# Altium PCB trial.PcbDoc
Units mm, origin at the board's own origin, x right, y up, seen from the top; angles counter-clockwise.
Board outline 60.58 x 35.94 mm, 4 copper layers (Top Layer, Layer 1, Layer 2, Bottom Layer), stack 0.603 mm thick; 3 components, 0 nets, 15 pads, 0 vias.
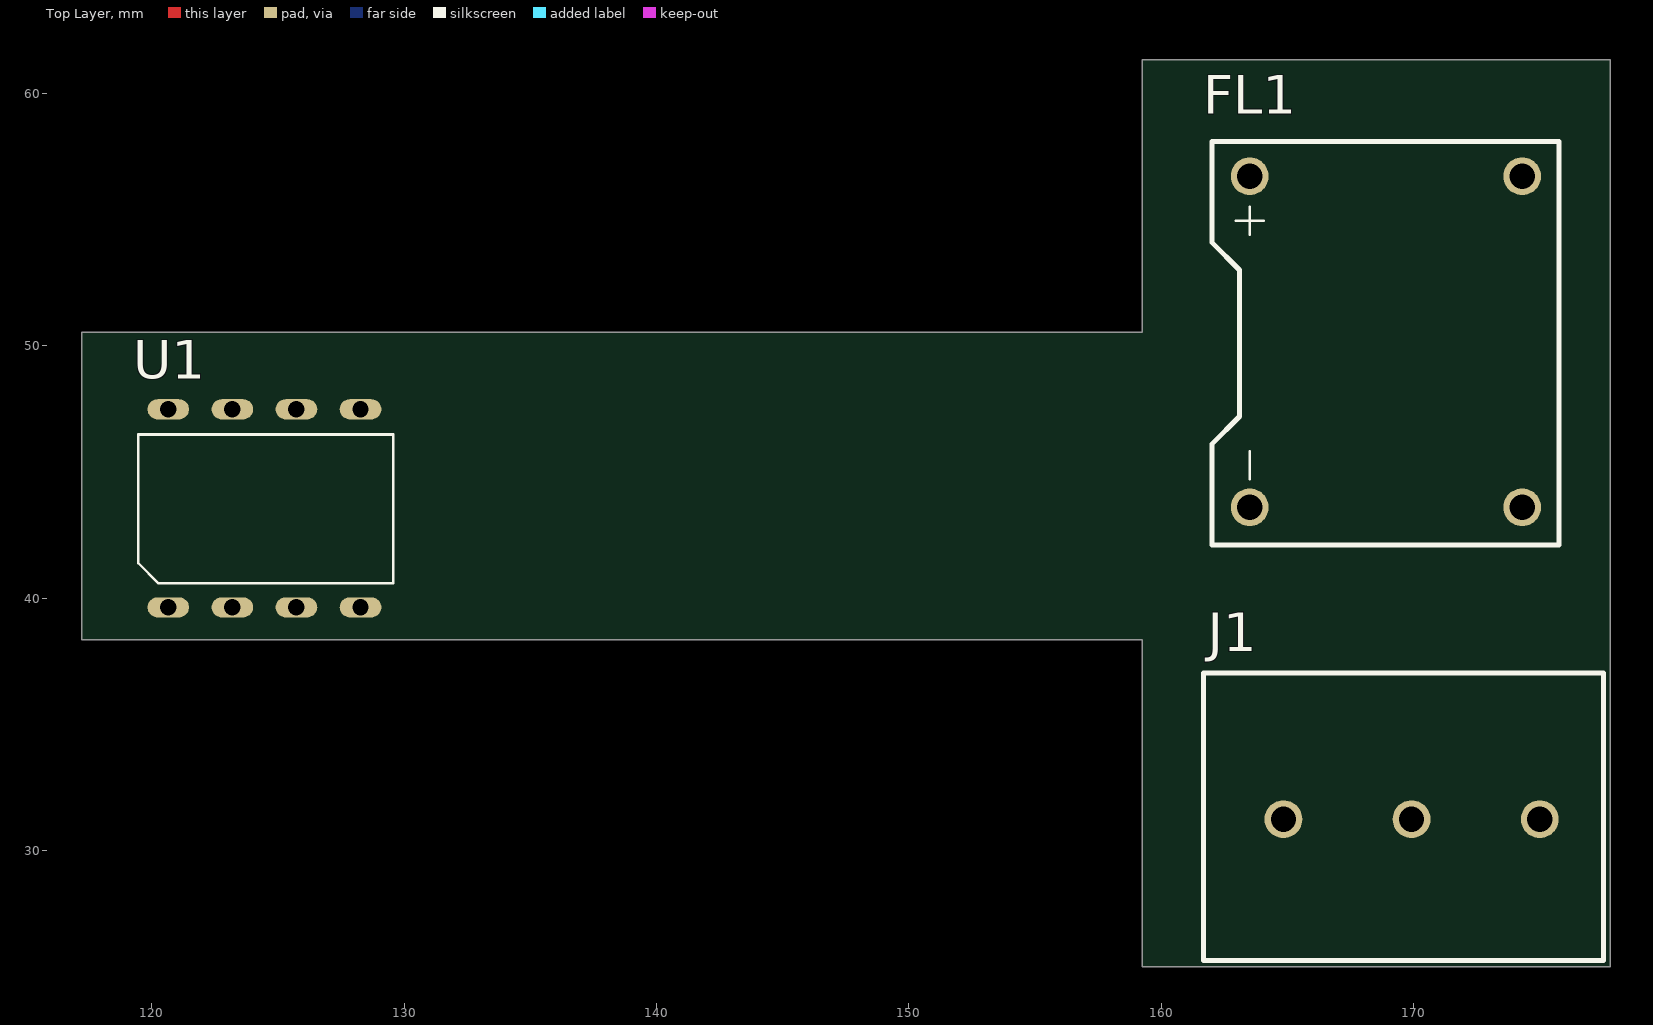
[diagram p0: Top Layer view]
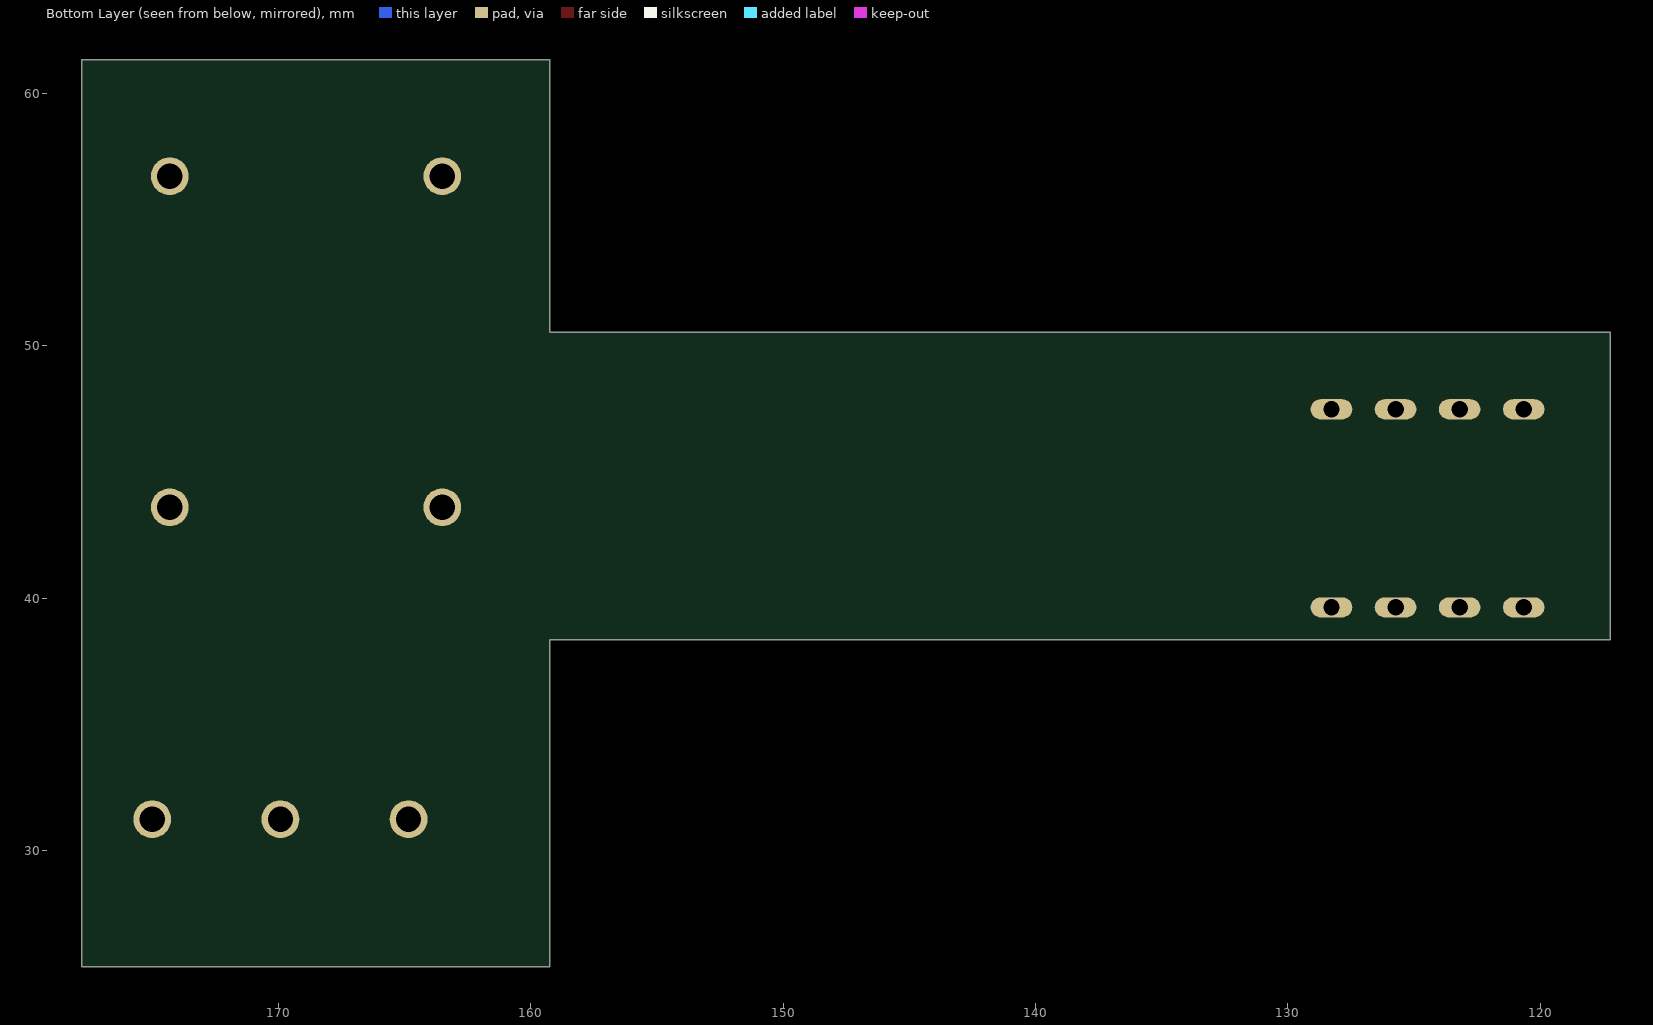
[diagram p1: Bottom Layer view, seen from below]
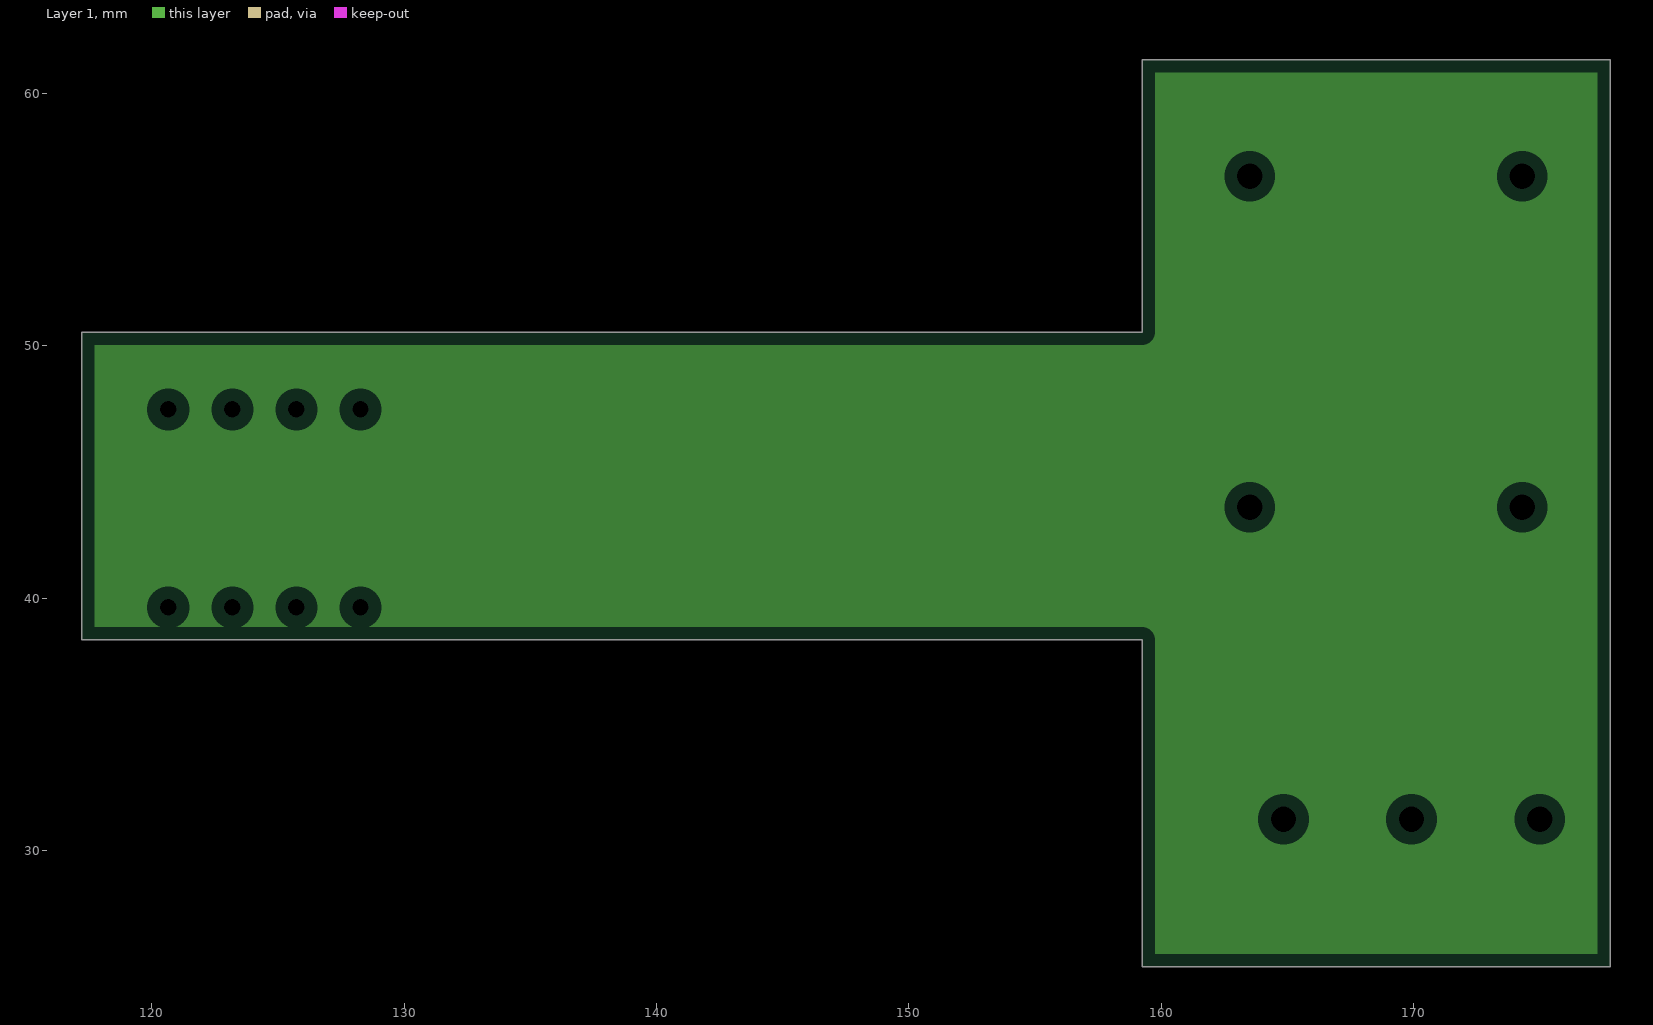
[diagram p2: Layer 1, clearances drawn from the general rule]
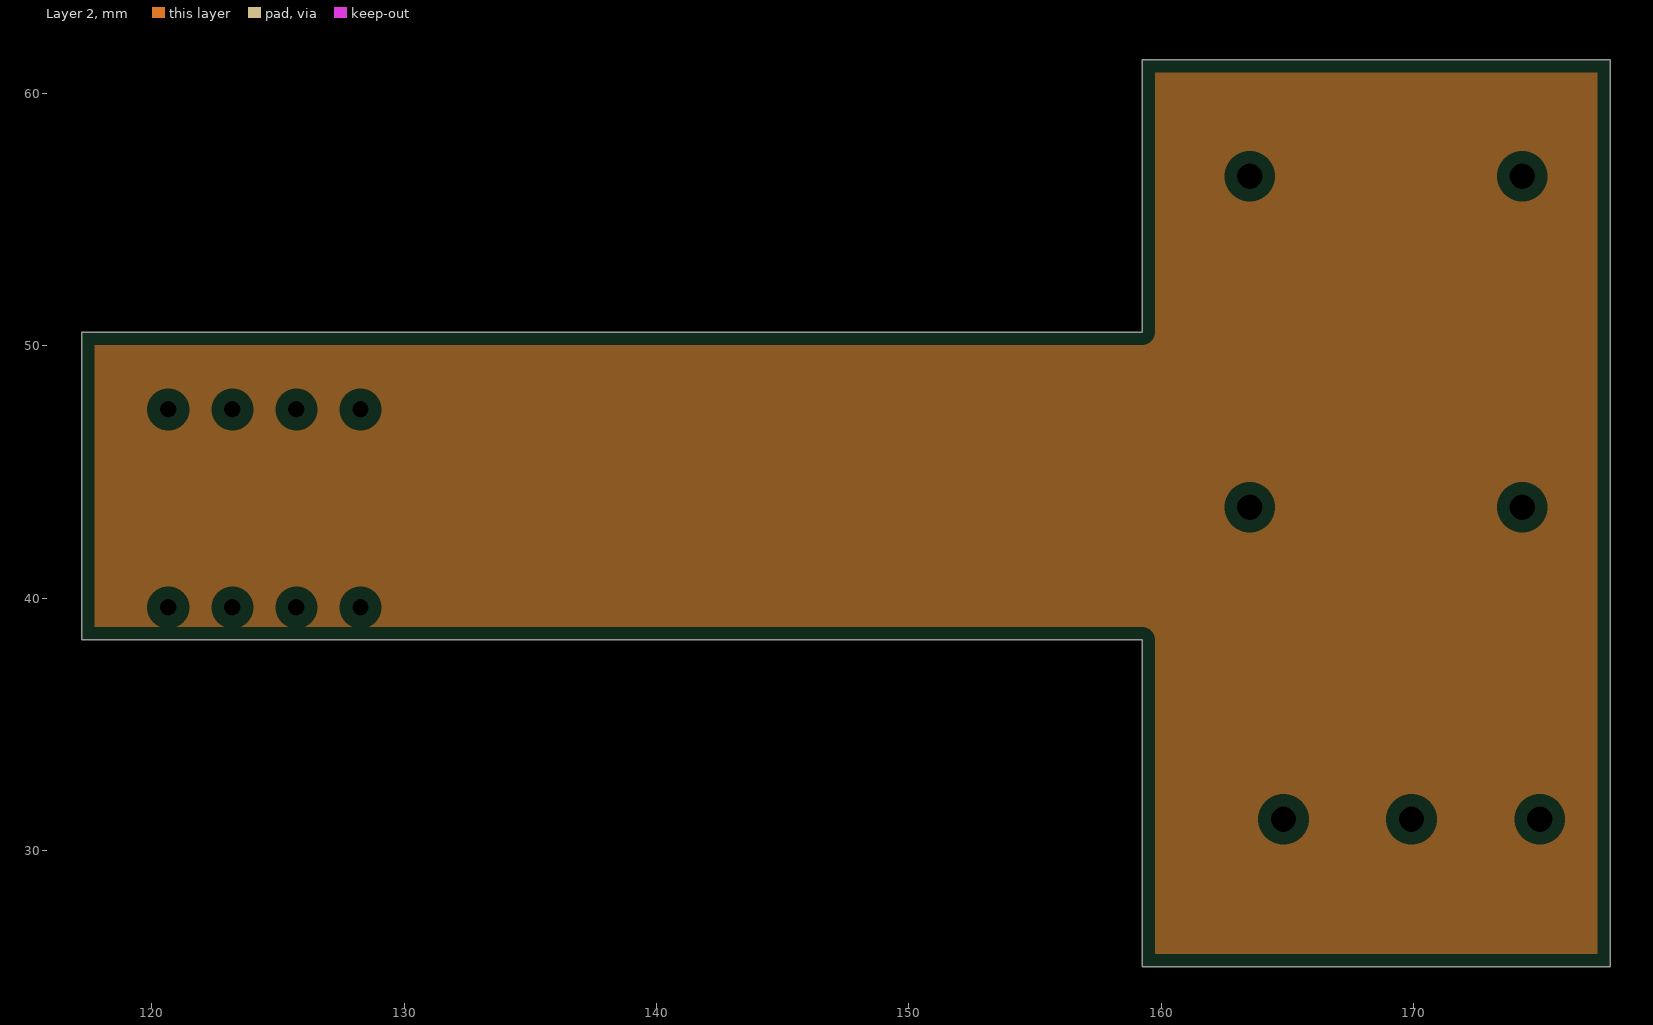
[diagram p3: Layer 2, clearances drawn from the general rule]

## Layer stack, top to bottom
Flex Top Coverlay: solder mask 0.0102, Solder Resist, Dk 3.5
Flex Top Coverlay: solder mask 0.012, FC-001, Dk 4
Top Layer: signal copper 0.0356
Dielectric 2: prepreg 0.0711, PP-006, Dk 4.1
Layer 1: plane copper 0.035
Dielectric 1: dielectric 0.32, FR-4, Dk 4.8
Layer 2: plane copper 0.035
Dielectric 3: prepreg 0.0711, PP-006, Dk 4.1
Bottom Layer: signal copper 0.0356
Bottom Solder: solder mask 0.012, FC-001, Dk 4
Bottom Solder: solder mask 0.0102, Solder Resist, Dk 3.5

## Board outline
117.221,38.354 159.258,38.354 159.258,25.4 177.8,25.4 177.8,61.341 159.258,61.341 159.258,50.546 117.221,50.546
board region left: 131.445,38.354 117.221,38.354 117.221,50.546 131.445,50.546
board region flex: 159.258,38.354 131.445,38.354 131.445,50.546 159.258,50.546
board region right: 159.258,61.341 177.8,61.341 177.8,25.4 159.258,25.4

## Design rules (kind name [scope] priority, off if disabled: settings)
Clearance [All] p1: gap=0.254 ignorepadtopadclearanceinfootprint=FALSE except(0: Arc-Hole Track-Hole SMDPad-Hole THPad-Hole Via-Hole Fill-Hole Poly-Hole Region-Hole Text-Hole)
PlaneClearance [All] p1: clearance=0.508
PlaneConnect [All] p1: planeconnectstyle=Relief reliefexpansion=0.508 reliefentries=4 reliefconductorwidth=0.254 reliefairgap=0.254
PolygonConnect [All] p1: connectstyle=Relief reliefconductorwidth=0.254 reliefentries=4 polygonreliefangle="90 Angle" airgapwidth=0.254
RoutingVias [All] p1: holewidth=0.711 width=1.27 viastyle="Through Hole" minholewidth=0.711 minwidth=1.27 maxholewidth=0.711 maxwidth=1.27
SolderMaskExpansion [All] p1: expansion=0.102 istentingtop=FALSE
Width [All] p1: maxlimit=0.254 minlimit=0.254 preferedwidth=0.254
28 further rules are at their usual default settings.

## Components (designator, comment, footprint, x,y, rotation, side; value= is the part's Value field where it differs from the comment)
FL1 "2x18mH" 2x18mH 168.91,50.165 r0 top
J1 "HEADER x3" "HEADER X3" 169.926,31.242 r0 top
U1 "UC3845" 8-DIP 124.46,43.688 r0 top

## Footprints (in the part's own frame and the unit in brackets; to place one, negate y for a bottom-side part, rotate by r counter-clockwise, add the part's x,y. Pads: shape width x height; smd on the part's side, far side on the other; paste and mask are expansions set on the pad)
2x18mH [mm]
  round 1.5 hole 1 mask+0.05: 1-(-5.4,-6.56) 2(5.4,-6.56) 3(5.4,6.56) 4+(-5.4,6.56)
  silkscreen extent -6.9,-8.06 6.85,7.94, body extent -7.5,-8.52 7.5,8.27, height 19.61
8-DIP [mm]
  oval 1.65x0.8 hole 0.65 mask+0.05: 1(-3.81,-4.05) 2(-1.27,-4.05) 3(1.27,-4.05) 4(3.81,-4.05) 5(3.81,3.8) 6(1.27,3.8) 7(-1.27,3.8) 8(-3.81,3.8)
  silkscreen extent -5,-3.1 5.1,2.8, body extent -5.42,-4.16 5.5,3.96, height 5.21
"HEADER X3" [mm]
  round 1.5 hole 1 mask+0.05: 1(-5.08,0) 2(0,0) 3(5.08,0)
  silkscreen extent -8.24,-5.6 7.6,5.8, body extent -8.24,-5.48 7.6,5.88, height 18.4

## Part data
FL1: library part "EMI Filter", "2x18mH choke"
U1: "Boost, Flyback Regulator Positive, Isolation Capable Output Step-Up/Step-Down  DC-DC Controller IC 8-Mini DIP", Manufacturer=STMicroelectronics, Manufacturer Part Number=UC3845BN, Supplier Part Number 1=497-14808-5-ND, Category="Voltage Regulators - Switching", ComponentLink1Description=https://datasheet.ciiva.com/15108/getdatasheetpartid-31655-15108079.pdf?src-supplier=Verical, ComponentLink1URL=https://datasheet.ciiva.com/15108/getdatasheetpartid-31655-15108079.pdf?src-supplier=Verical, ComponentLink2Description=https://datasheet.ciiva.com/16394/cd00000966-16394470.pdf?src-supplier=Future+Electronics, ComponentLink2URL=https://datasheet.ciiva.com/16394/cd00000966-16394470.pdf?src-supplier=Future+Electronics, ComponentLink3Description=https://datasheet.ciiva.com/4875/cd00000966-4875756.pdf?src-supplier=Mouser, ComponentLink3URL=https://datasheet.ciiva.com/4875/cd00000966-4875756.pdf?src-supplier=Mouser, ComponentLink4Description=https://datasheet.ciiva.com/45260/cd00000966-45260200.pdf?src-supplier=Digikey, ComponentLink4URL=https://datasheet.ciiva.com/45260/cd00000966-45260200.pdf?src-supplier=Digikey, ComponentLink5Description=https://datasheet.ciiva.com/1513/1696818-1513208.pdf?src-supplier=Element14, ComponentLink5URL=https://datasheet.ciiva.com/1513/1696818-1513208.pdf?src-supplier=Element14, Pricing 1="1=0,99, 10=0,889, 50=0,8438, 100=0,6932, 250=0,64796, 500=0,57262, 1000=0,45208, 2500=0,42194, 5000=0,40084 (USD)", RoHS=Yes, Stock 1=2211, Supplier 1=Digikey

## Nets (pads, with @x,y where several pads share a name; then routed paths per layer and width w, separated by ;. In a path a pad name is that pad's centre, name@x,y a point inside that pad or via, vN(x,y) a via of type N, cw(c..) or ccw(c..) an arc to the next point about the centre after c; other vN are vias at no path point)
pads on no net: FL1.1- FL1.2 FL1.3 FL1.4+ J1.1 J1.2 J1.3 U1.1 U1.2 U1.3 U1.4 U1.5 U1.6 U1.7 U1.8

## Polygon pours and split planes (outlines as drawn)
no net on Layer 1 (split plane): 177.29,25.91 159.768,25.91 159.768,38.354 159.759,38.454 159.73,38.549 159.682,38.638 159.619,38.715 159.542,38.778 159.453,38.826 159.358,38.855 159.258,38.864 159.258,50.036 159.358,50.045 159.453,50.074 159.542,50.122 159.619,50.185 159.682,50.262 159.73,50.351 159.759,50.446 159.768,50.546 159.768,60.831 177.29,60.831
no net on Layer 1 (split plane): 131.445,38.864 117.731,38.864 117.731,50.036 131.445,50.036
no net on Layer 2 (split plane): 177.29,25.91 159.768,25.91 159.768,38.354 159.759,38.454 159.73,38.549 159.682,38.638 159.619,38.715 159.542,38.778 159.453,38.826 159.358,38.855 159.258,38.864 117.731,38.864 117.731,50.036 159.258,50.036 159.358,50.045 159.453,50.074 159.542,50.122 159.619,50.185 159.682,50.262 159.73,50.351 159.759,50.446 159.768,50.546 159.768,60.831 177.29,60.831